# Altium PCB Bottom Board_Panel.PcbDoc
Units mm, origin at the board's own origin, x right, y up, seen from the top; angles counter-clockwise.
Board outline 157.6 x 188.6 mm, 4 copper layers (Top Layer, (Inserted) GND, (Inserted) VCC, Bottom Layer); 8 components, 0 nets, 40 pads, 0 vias.
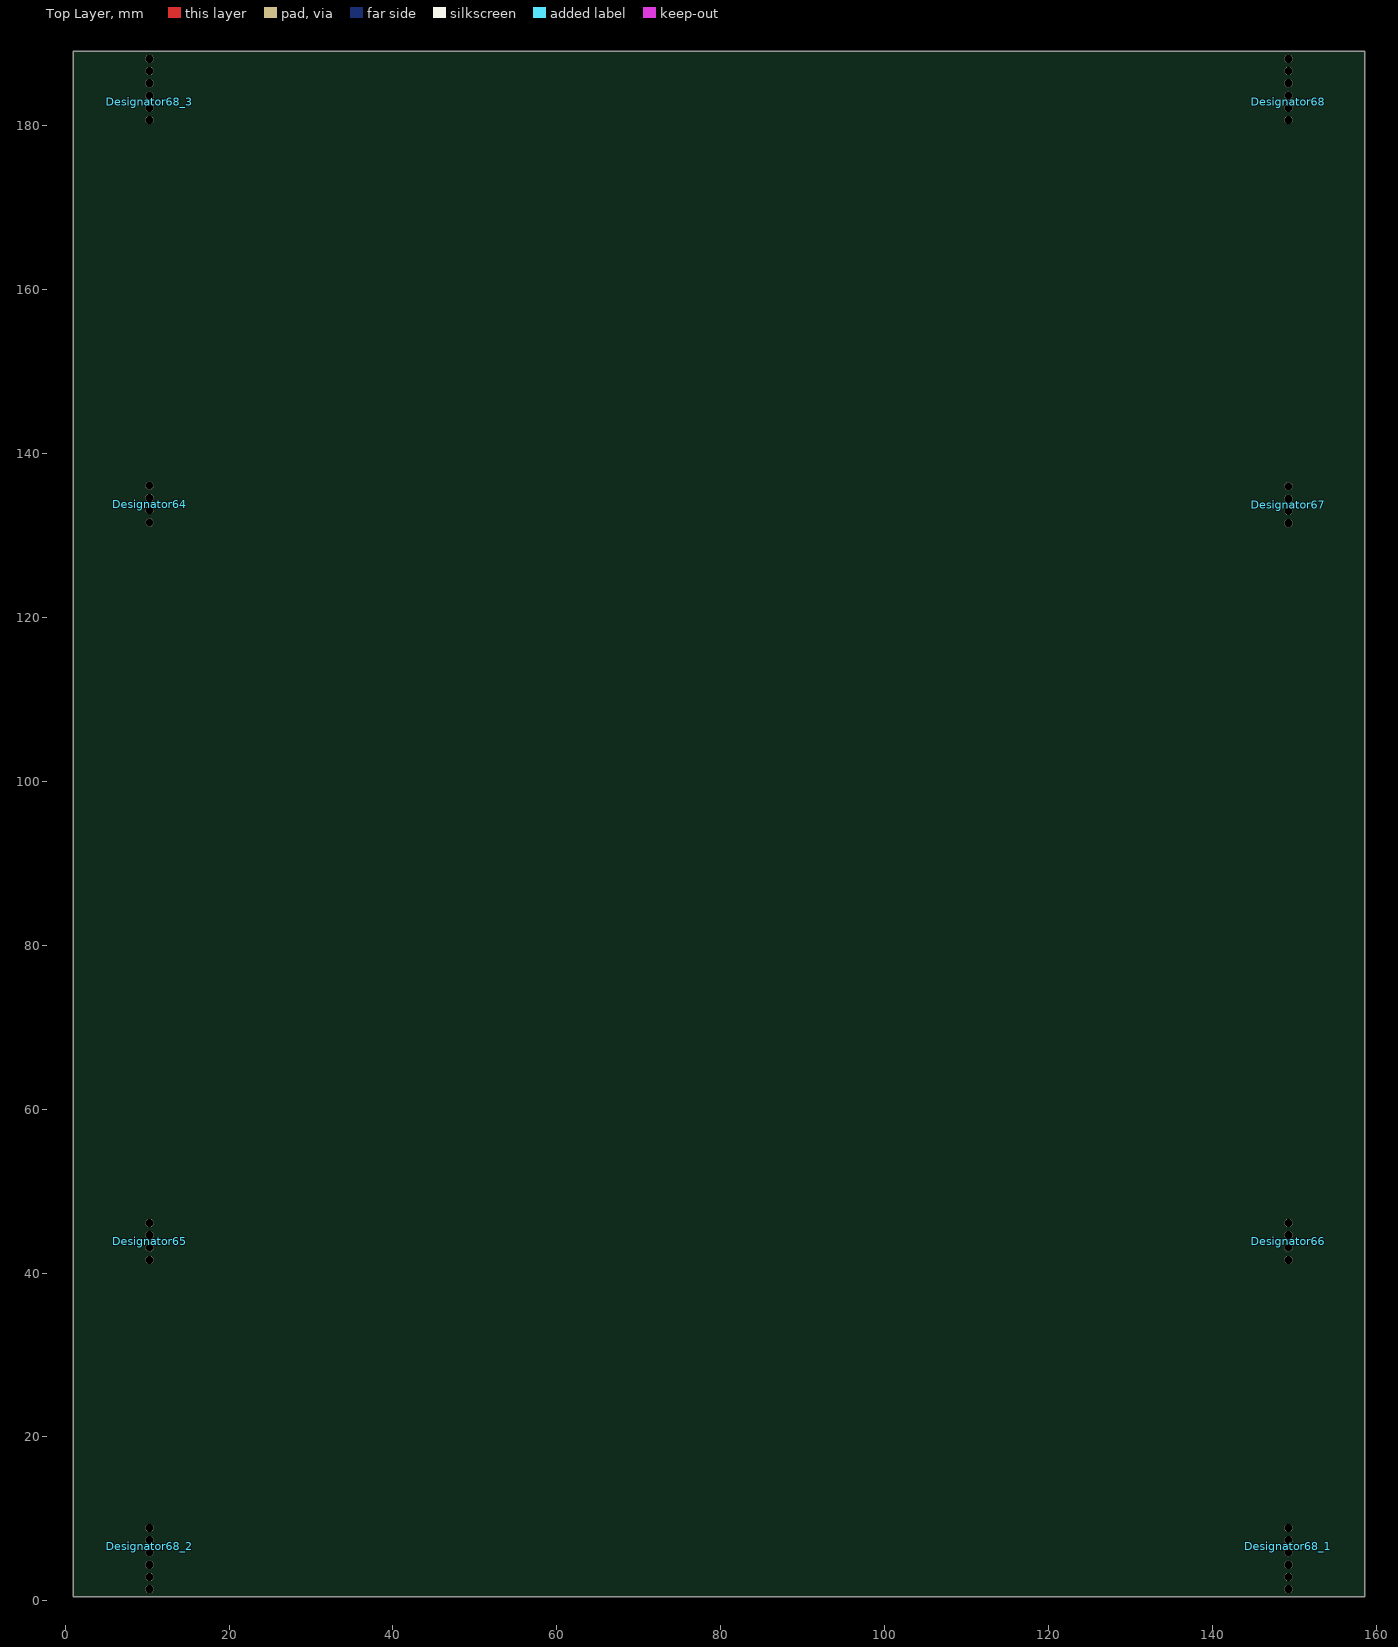
[diagram p0: Top Layer view]
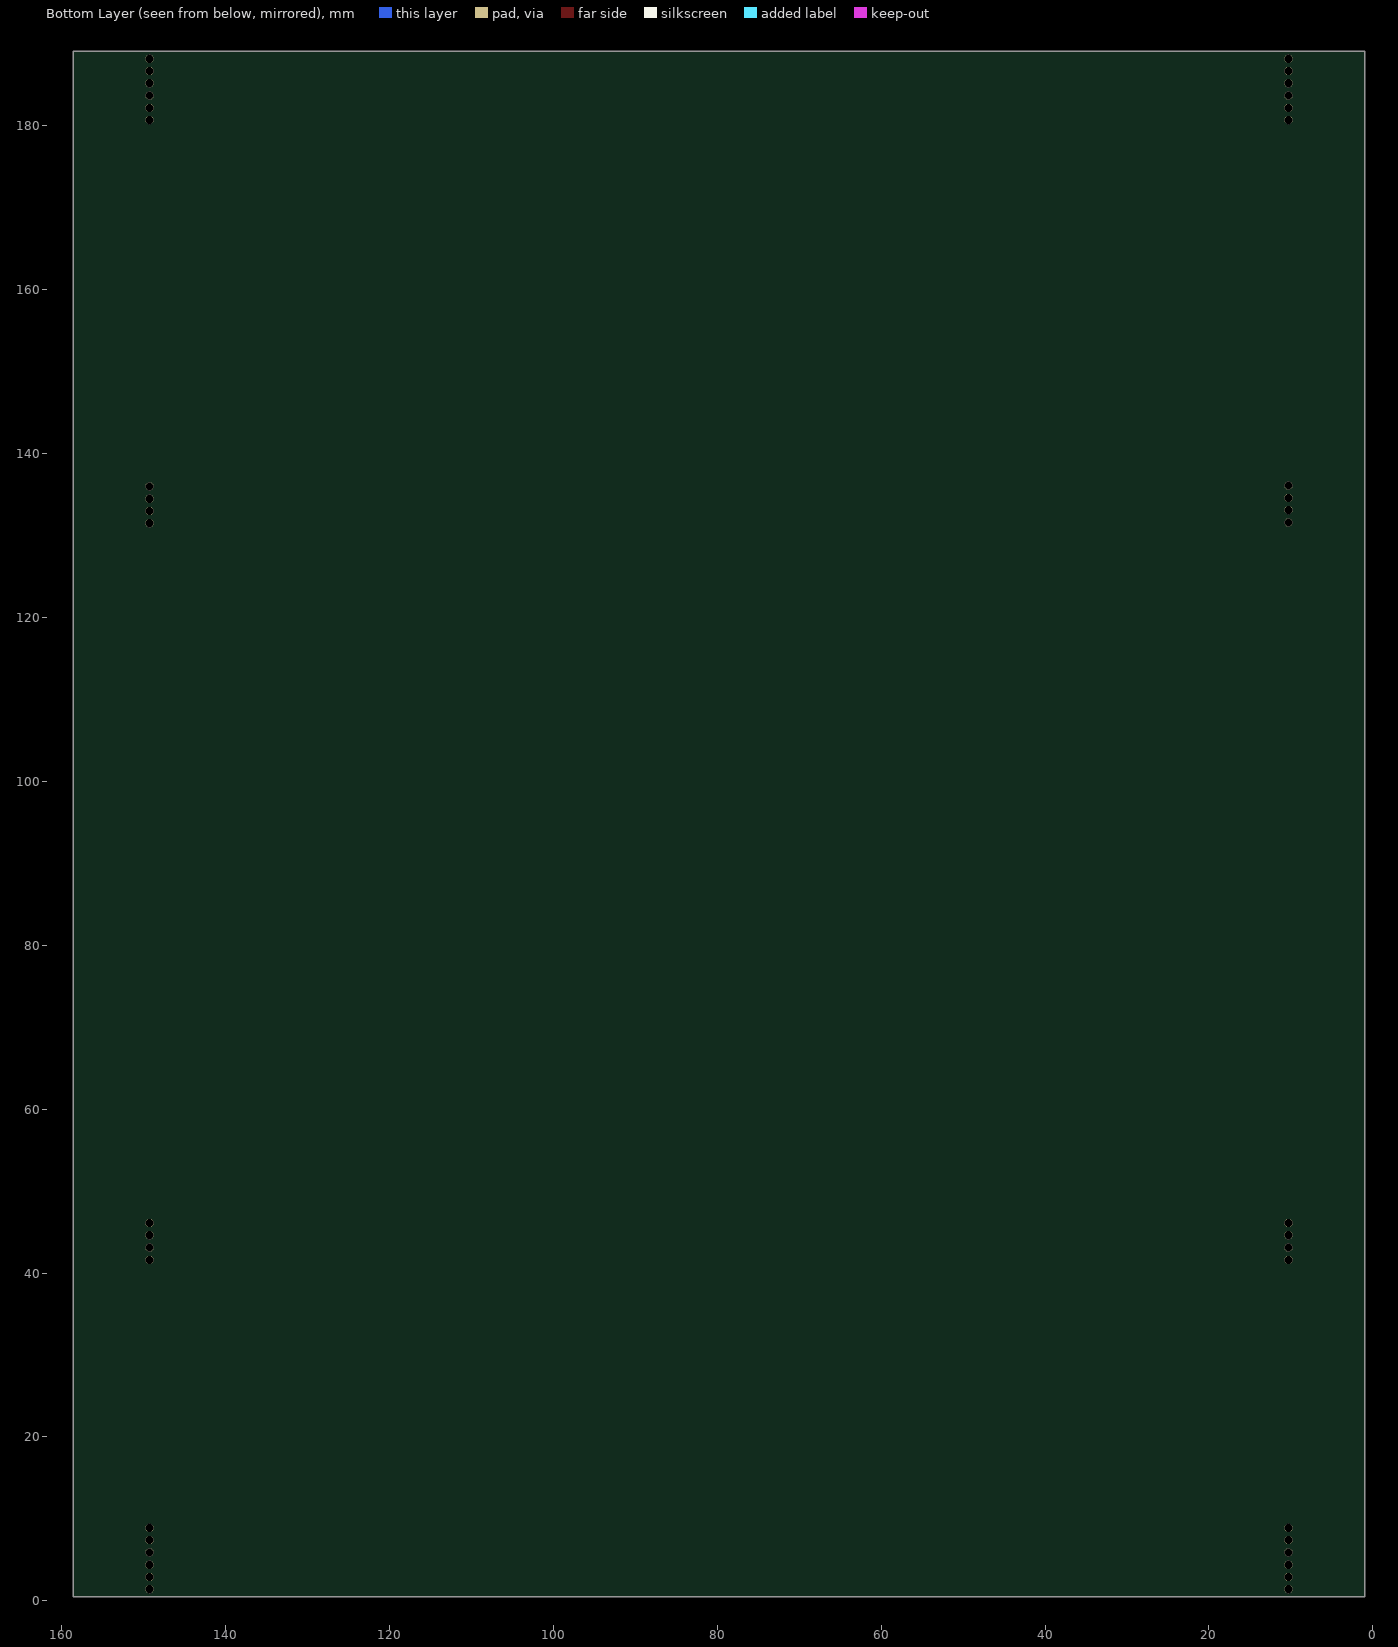
[diagram p1: Bottom Layer view, seen from below]

## Layer stack, top to bottom
Top Solder: solder mask 0.0102, Solder Resist, Dk 3.5
Top Layer: signal copper 0.0356
(Inserted) Dielectric 3: prepreg 0.32, FR-4, Dk 4.8
(Inserted) GND: signal copper 0.0356
(Inserted) Dielectric 2: prepreg 0.32, FR-4, Dk 4.8
(Inserted) VCC: signal copper 0.0356
Dielectric 1: dielectric 0.32, FR-4, Dk 4.8
Bottom Layer: signal copper 0.0356
Bottom Solder: solder mask 0.0102, Solder Resist, Dk 3.5

## Board outline
1,0.5 1,189.1 158.6,189.1 158.6,0.5

## Design rules (kind name [scope] priority, off if disabled: settings)
Clearance [All] p1: gap=0.254 ignorepadtopadclearanceinfootprint=FALSE except(0: Arc-Hole Track-Hole SMDPad-Hole THPad-Hole Via-Hole Fill-Hole Poly-Hole Region-Hole Text-Hole)
PolygonConnect [All] p1: connectstyle=Relief reliefconductorwidth=0.254 reliefentries=4 polygonreliefangle="90 Angle" airgapwidth=0.254
RoutingVias [All] p1: holewidth=0.711 width=1.27 viastyle="Through Hole" minholewidth=0.711 minwidth=1.27 maxholewidth=0.711 maxwidth=1.27
SolderMaskExpansion [All] p1: expansion=0.102
Width [All] p1: maxlimit=0.254 minlimit=0.254 preferedwidth=0.254
30 further rules are at their usual default settings.

## Components (designator, comment, footprint, x,y, rotation, side; value= is the part's Value field where it differs from the comment)
Designator64 "Comment" "Mouse Bite" 10.3,131.6 r180 top
Designator65 "Comment" "Mouse Bite" 10.3,41.6 r180 top
Designator66 "Comment" "Mouse Bite" 149.3,41.6 r180 top
Designator67 "Comment" "Mouse Bite" 149.3,131.5 r180 top
Designator68 "Comment" "Mouse Bite" 149.3,180.7 r180 top
Designator68_1 "Comment" "Mouse Bite" 149.3,8.9 r0 top
Designator68_2 "Comment" "Mouse Bite" 10.3,8.9 r0 top
Designator68_3 "Comment" "Mouse Bite" 10.3,180.7 r180 top

## Footprints (in the part's own frame and the unit in brackets; to place one, negate y for a bottom-side part, rotate by r counter-clockwise, add the part's x,y. Pads: shape width x height; smd on the part's side, far side on the other; paste and mask are expansions set on the pad)
"Mouse Bite" [mm] "L4.5mm, D1mm, P1.5mm"
  round 1 hole 1 mask+0: 0(0,0) 0(0,-1.5) 0(0,-3) 0(0,-4.5)

## Free pads (board coordinates)
  round 1 hole 1 mask+0: 0(10.3,1.4) 0(10.3,2.9) 0(10.3,186.7) 0(10.3,188.2) 0(149.3,1.4) 0(149.3,2.9) 0(149.3,186.7) 0(149.3,188.2)

## Nets (pads, with @x,y where several pads share a name; then routed paths per layer and width w, separated by ;. In a path a pad name is that pad's centre, name@x,y a point inside that pad or via, vN(x,y) a via of type N, cw(c..) or ccw(c..) an arc to the next point about the centre after c; other vN are vias at no path point)
pads on no net: Designator64.0 Designator65.0 Designator66.0 Designator67.0 Designator68.0 Designator68_1.0 Designator68_2.0 Designator68_3.0

## Silkscreen, mask and mechanical layers (free items; w line width, h text height)
Mechanical 1:
  the board outline again, w0.2
Route Tool Path:
  lines w2.311: 9.144,40.8 9.144,14.8 ; 9.144,46.8 9.144,84.8 ; 9.144,130.8 9.144,104.8 ; 9.144,136.8 9.144,174.8 ; 9.156,84.8 9.156,104.5 ; 144.901,144.715 144.901,144.717 ; 150.456,40.8 150.456,14.8 cw(c144.3,14.8) 144.3,8.644 ; 150.456,46.8 150.456,84.8 ccw(c144.3,84.8) 144.3,90.956 ; 150.456,85.1 150.456,104.8 ; 150.456,130.8 150.456,104.8 ; 150.456,136.8 150.456,174.8 ccw(c144.3,174.8) 144.3,180.956 ; 9.144,14.8 ccw(c15.3,14.8) 15.297,8.644 ; 9.144,14.8 9.144,14.8 ; 9.144,84.8 cw(c15.3,84.8) 9.144,84.803 ; 9.144,84.8 cw(c10.3,84.8) 9.144,84.803 ; 9.144,84.8 cw(c10.3,84.8) 9.144,84.803 ; 9.144,84.803 cw(c15.3,84.8) 15.3,90.956 ; 9.144,104.8 ccw(c15.3,104.8) 15.297,98.644 ; 9.144,104.8 9.144,104.8 ; 9.144,174.8 cw(c15.3,174.8) 9.144,174.803 ; 9.144,174.8 cw(c10.3,174.8) 9.144,174.803 ; 9.144,174.8 cw(c10.3,174.8) 9.144,174.803 ; 9.144,174.803 cw(c15.3,174.8) 15.3,180.956 ; 14.706,54.797 ccw(c15.3,54.797) 15.894,54.797 ; 14.706,54.797 14.706,82.726 cw(c15.3,82.726) 15.894,82.726 ; 14.706,54.797 14.706,54.797 ; 14.706,144.797 ccw(c15.3,144.797) 15.894,144.797 ; 14.706,144.797 14.706,172.726 cw(c15.3,172.726) 15.894,172.726 ; 14.706,144.797 14.706,144.797 ; 15.297,8.644 ccw(c15.3,9.8) 15.3,8.644 ; 15.297,8.644 ccw(c15.3,9.8) 15.3,8.644 ; 15.297,8.644 ccw(c15.3,14.8) 15.3,8.644 ; 15.297,98.644 ccw(c15.3,99.8) 15.3,98.644 ; 15.297,98.644 ccw(c15.3,99.8) 15.3,98.644 ; 15.297,98.644 ccw(c15.3,104.8) 15.3,98.644 ; 15.3,8.644 144.298,8.644 ; 15.3,90.956 144.3,90.956 ; 15.3,90.956 15.3,90.956 ; 15.3,98.644 144.298,98.644 ; 15.3,180.956 144.3,180.956 ; 15.3,180.956 15.3,180.956 ; 15.894,54.797 cw(c17.05,54.797) 15.894,54.8 ; 15.894,54.797 15.894,54.8 ; 15.894,54.8 15.894,82.724 ; 15.894,82.724 cw(c17.05,82.726) 15.894,82.726 ; 15.894,82.724 15.894,82.726 ; 15.894,144.797 cw(c17.05,144.797) 15.894,144.8 ; 15.894,144.797 15.894,144.8 ; 15.894,144.8 15.894,172.724 ; 15.894,172.724 cw(c17.05,172.726) 15.894,172.726 ; 15.894,172.724 15.894,172.726 ; 15.901,16.847 cw(c17.056,16.847) 15.901,16.849 ; 15.901,16.847 cw(c15.306,16.847) 14.712,16.847 14.712,34.847 cw(c15.306,34.847) 15.901,34.847 ; 15.901,16.847 15.901,16.849 ; 15.901,16.849 15.901,34.845 ; 15.901,34.845 cw(c17.056,34.847) 15.901,34.847 ; 15.901,34.845 cw(c17.056,34.847) 15.901,34.847 ; 15.901,34.845 15.901,34.847 ; 15.901,106.847 cw(c17.056,106.847) 15.901,106.849 ; 15.901,106.847 cw(c15.306,106.847) 14.712,106.847 14.712,124.847 cw(c15.306,124.847) 15.901,124.847 ; 15.901,106.847 15.901,106.849 ; 15.901,106.849 15.901,124.845 ; 15.901,124.845 cw(c17.056,124.847) 15.901,124.847 ; 15.901,124.845 cw(c17.056,124.847) 15.901,124.847 ; 15.901,124.845 15.901,124.847 ; 143.712,54.715 ccw(c144.306,54.715) 144.901,54.715 ; 143.712,54.715 143.712,82.726 cw(c144.306,82.726) 144.901,82.726 144.901,54.717 ; 143.712,54.715 143.712,54.715 ; 144.298,8.644 ccw(c144.3,9.8) 144.3,8.644 ; 144.298,8.644 ccw(c144.3,9.8) 144.3,8.644 ; 144.298,8.644 144.3,8.644 ; 144.298,98.644 ccw(c144.3,99.8) 144.3,98.644 ; 144.298,98.644 ccw(c144.3,99.8) 144.3,98.644 ; 144.298,98.644 144.3,98.644 ; 144.3,90.956 144.3,90.956 ; 144.3,98.644 ccw(c144.3,104.8) 150.456,104.8 ; 144.3,180.956 144.3,180.956 ; 144.901,16.847 cw(c146.056,16.847) 144.901,16.849 ; 144.901,16.847 cw(c144.306,16.847) 143.712,16.847 143.712,34.847 cw(c144.306,34.847) 144.901,34.847 ; 144.901,16.847 144.901,16.849 ; 144.901,16.849 144.901,34.845 ; 144.901,34.845 cw(c146.056,34.847) 144.901,34.847 ; 144.901,34.845 cw(c146.056,34.847) 144.901,34.847 ; 144.901,34.845 144.901,34.847 ; 144.901,54.715 cw(c146.056,54.715) 144.901,54.717 ; 144.901,54.715 144.901,54.717 ; 144.901,106.847 cw(c146.056,106.847) 144.901,106.849 ; 144.901,106.847 cw(c144.306,106.847) 143.712,106.847 143.712,124.847 cw(c144.306,124.847) 144.901,124.847 ; 144.901,106.847 144.901,106.849 ; 144.901,106.849 144.901,124.845 ; 144.901,124.845 cw(c146.056,124.847) 144.901,124.847 ; 144.901,124.845 cw(c146.056,124.847) 144.901,124.847 ; 144.901,124.845 144.901,124.847 ; 144.901,144.717 ccw(c146.056,144.715) 144.901,144.715 cw(c144.306,144.715) 143.712,144.715 143.712,144.715 143.712,172.726 cw(c144.306,172.726) 144.901,172.726 144.901,144.717

## Dimensions
1,0.5 to 9.144,40.8 on Mechanical 1
1,189.1 to 9.144,136.8 on Mechanical 1
150.456,136.8 to 150.456,130.8 on Mechanical 1
150.456,46.8 to 150.456,40.8 on Mechanical 1
9.144,46.8 to 9.144,40.8 on Mechanical 1
9.144,136.8 to 9.144,130.8 on Mechanical 1

## Panel: embedded boards
"Bottom Board_PCB.PcbDoc" at 10.3,9.8, 2 rows x 1 columns, spacing 90 x 140, rotation 0